# Altium PCB AQM with esp32.PcbDoc
Units mil, origin at the board's own origin, x right, y up, seen from the top; angles counter-clockwise.
Board outline 3850 x 2015 mil, 2 copper layers (Top Layer, Bottom Layer); 72 components, 75 nets, 269 pads, 0 vias.
Unrouted connection lines stored in the file: 182.
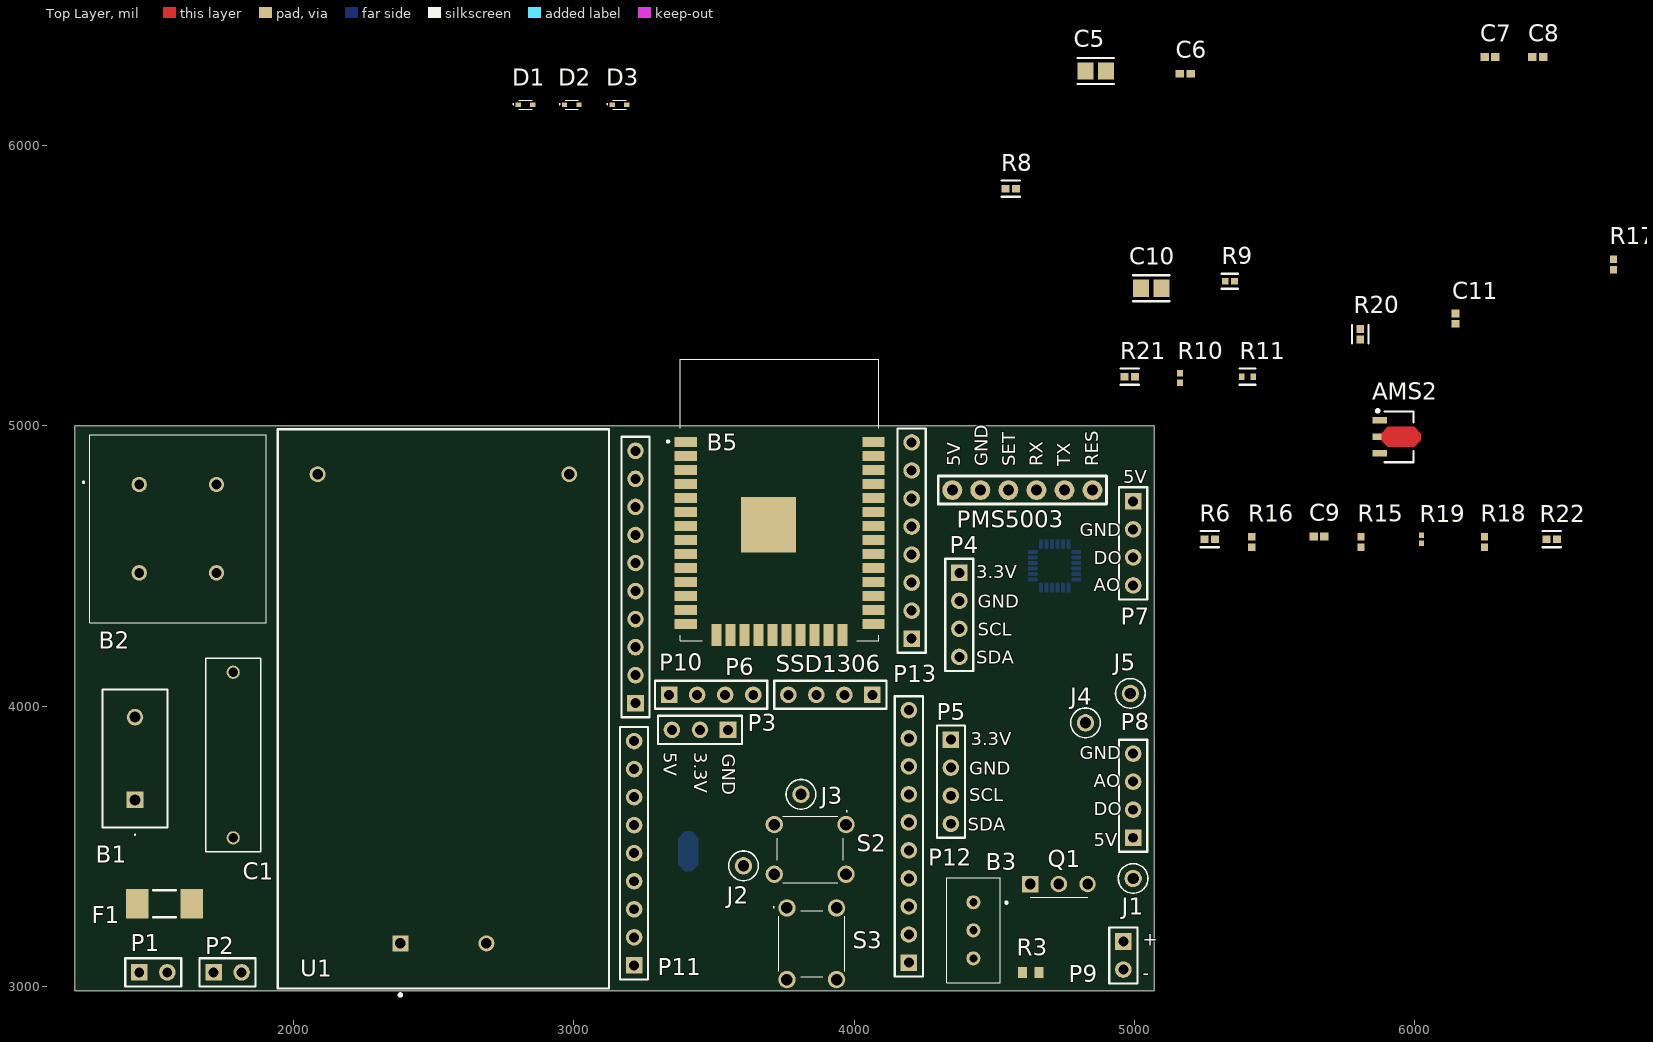
[diagram p0: Top Layer view]
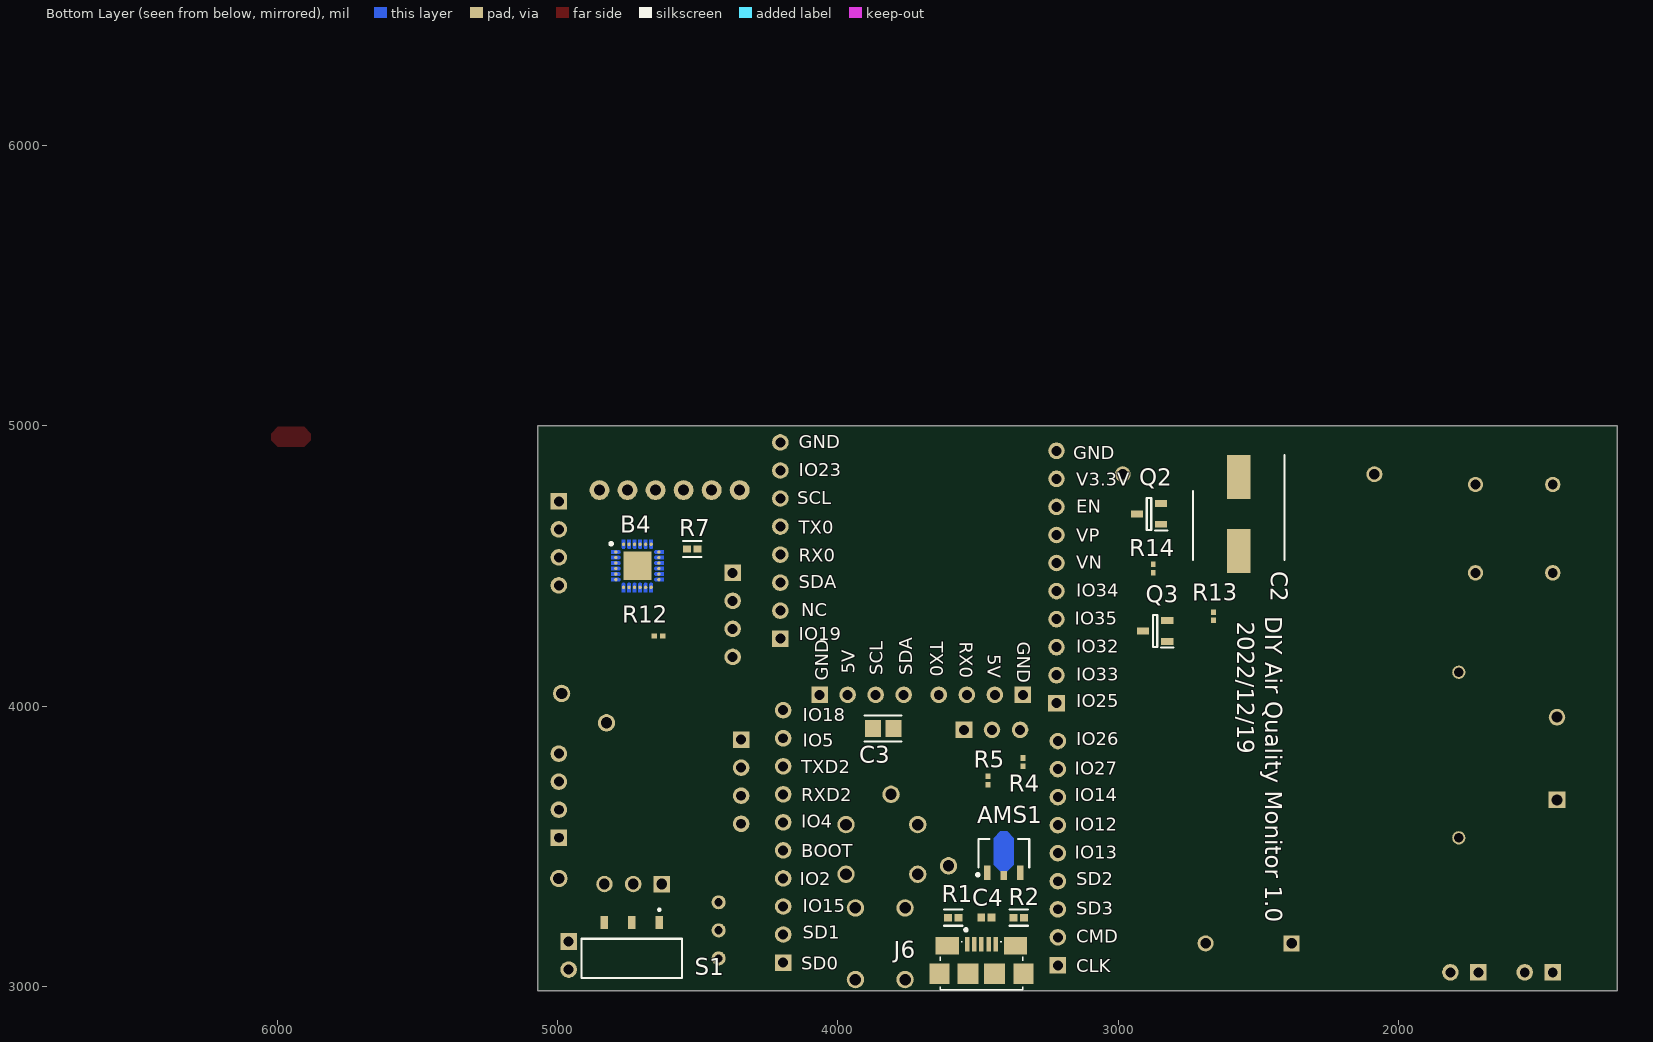
[diagram p1: Bottom Layer view, seen from below]

## Layer stack, top to bottom
Top Solder: solder mask 0.4, Solder Resist, Dk 3.5
Top Layer: signal copper 1.4
Dielectric 1: dielectric 12.6, FR-4, Dk 4.8
Bottom Layer: signal copper 1.4
Bottom Solder: solder mask 0.4, Solder Resist, Dk 3.5

## Board outline
1220,2985 5070,2985 5070,5000 1220,5000

## Design rules (kind name [scope] priority, off if disabled: settings)
Clearance [All] p1: gap=5.98 ignorepadtopadclearanceinfootprint=FALSE
MinimumSolderMaskSliver [All] p1: minsoldermaskwidth=0.98
PolygonConnect [All] p1: connectstyle=Relief reliefconductorwidth=10 reliefentries=4 polygonreliefangle="90 Angle" airgapwidth=10
RoutingVias [All] p1: holewidth=28 width=50 viastyle="Through Hole" minholewidth=28 minwidth=50 maxholewidth=28 maxwidth=50
SilkToSilkClearance [All] p1: silktosilkclearance=1
SilkToSolderMaskClearance [IsPad] p1: minsilkscreentomaskgap=5 clearancetoexposedcopper=TRUE
SolderMaskExpansion [All] p1: expansion=4.02
Width [All] p1: maxlimit=12.01 minlimit=5.98 preferedwidth=10
27 further rules are at their usual default settings.

## Classes and differential pairs
component class "ESP32 module desing": AMS2 B4 B5 C5 C6 C7 C8 C9 C10 C11 D1 D2 D3 J6 P10 P11 P12 P13 Q2 Q3 R6 R7 R8 R9 R10 R11 R12 R13 R14 R15 R16 R17 R18 R19 R20 R21 R22 S2 S3
component class "air quality monitor add esp32 chip": AMS1 B1 B2 B3 C1 C2 C3 C4 F1 J1 J2 J3 J4 J5 P1 P2 P3 P4 P5 P7 P8 P9 PMS5003 Q1 R1 R2 R3 R4 R5 S1 SSD1306 U1

## Components (designator, comment, footprint, x,y, rotation, side; value= is the part's Value field where it differs from the comment)
AMS1 "IC1" SOT89-150P350X150-3N 3408.07,3466.02 r90 bottom
AMS2 "IC1" SOT89-150P350X150-3N 5935,4960 r0 top
B1 "10D561K" 10D561K 1435,3665 r90 top
B2 "UU9.8Y-10MH" UU98Y10MH 1450,4789.96 r180 top
B3 "3296X-1-103" 3296X1223LF 4425,3200 r180 top
B4 "CP2102N-A02-GQFN24R" QFN50P400X400X80-25N-D 4715,4500 r180 bottom
B5 "ESP32-WROOM-32D" ESP32WROOM32D 3720,4725 r0 top
C1 "0.1uF" MPX-104K275VAC-C-D2 1785,3825 r90 top
C2 "220uF" CAPAE830X1050N 2570,4685 r270 bottom
C3 "22uF" FP-GRM219-0_2-0_15-IPC_A 3838.55,3920 r0 bottom
C4 "10uF" CAPC1005X70N 3470,3245 r0 bottom
C5 "4.7uF" FP-CL21-IPC_A 4861.45,6265 r0 top
C6 "100nF" CAPC1050X55X23ML05T13 5180.71,6255 r0 top
C7 "100nF" CAPC1050X55X23ML05T13 6267.83,6315 r0 top
C8 "100nF" CAPC1050X55X23ML05T13 6437.83,6315 r0 top
C9 "100nF" CAPC1050X55X23ML05T13 5657.83,4605 r0 top
C10 "22uF" FP-GRM219-0_2-0_15-IPC_A 5060,5490 r0 top
C11 "10uF" CAPC1005X70N 6145,5381.89 r90 top
D1 "LESD5D5.0CT1G" LESD5D50CT1G 2827.83,6145 r0 top
D2 "LESD5D5.0CT1G" LESD5D50CT1G 2992.83,6145 r0 top
D3 "LESD5D5.0CT1G" LESD5D50CT1G 3162.83,6145 r0 top
F1 "S6125-M2-0.5A" CAPC6125X25N 1540,3295 r0 top
J1 "5004" FP-5004-MFG 4995,3385 r0 top
J2 "5004" FP-5004-MFG 3605,3430 r0 top
J3 "5004" FP-5004-MFG 3810,3685 r0 top
J4 "5004" FP-5004-MFG 4825,3940 r0 top
J5 "5004" FP-5004-MFG 4985,4045 r0 top
J6 "10118192-0001LF" AMPHENOL_10118192-0001LF 3487.76,3150.32 r180 bottom
P1 "AC Current suppy pin Header 2" HDR1X2 1450,3050 r0 top
P2 "uv lamp connect pin Header 2" HDR1X2 1715,3050 r0 top
P3 "Header 3" HDR1X3 3550,3915 r180 top
P4 "Si7021 Sensor Header" HDR1X4 4375,4475 r270 top
P5 "SGP30 Sensor Header" HDR1X4 4345,3880 r270 top
P6 "ZE08-CH2O sensor Header" HDR1X4 3340,4040 r0 top
P7 "MQ7 sensor Header" HDR1X4 4995,4730 r270 top
P8 "MQ131 sensor Header" HDR1X4 4995,3530 r90 top
P9 "5V FAN Header 2" HDR1X2 4960,3160 r270 top
P10 "Header 10" HDR1X10 3220,4010 r90 top
P11 "Header 9" HDR1X9 3215,3075 r90 top
P12 "Header 10" HDR1X10 4195,3085 r90 top
P13 "Header 8" HDR1X8 4205,4240 r90 top
PMS5003 "PMS5003" "PMS5003 PM2.5 Sensor" 4600,4770 r90 top
Q1 "2SC1384-TA" 2SC1384-TA 4627.64,3365 r0 top
Q2 "SS8050-G" SOT95P240X115-3N 2890,4685 r0 bottom
Q3 "SS8050-G" SOT95P240X115-3N 2868.31,4267.4 r0 bottom
R1 "0R" FP-RC0402-0_4-IPC_A 3588.84,3245 r0 bottom
R2 "0R" FP-RC0402-0_4-IPC_A 3355,3245 r180 bottom
R3 "3.3kΩ" RESC1608X55X25ML10T15 4630,3050 r180 top
R4 "10kΩ" RESC1005X40X25LL05T10 3340,3799.76 r270 bottom value=10kO
R5 "10kΩ" RESC1005X40X25LL05T10 3465,3734.76 r270 bottom value=10kO
R6 "0R" FP-RC0402-0_4-IPC_A 5267.83,4595 r0 top
R7 "0R" FP-RC0402-0_4-IPC_A 4518.84,4560 r180 bottom
R8 "0R" FP-RC0402-0_4-IPC_A 4558.84,5845 r0 top
R9 "22.1kΩ" FP-RC0402-0_4-IPC_B 5340,5515 r0 top value=22.1kO
R10 "47.5kΩ" RESC1005X40X25NL05T10 5162.83,5170 r90 top value=47.5kO
R11 "2kΩ" FP-RC_L0402-MFG 5402.83,5175 r0 top value=2kO
R12 "10kΩ" RESC1005X40X25LL05T10 4640,4250 r180 bottom value=10kO
R13 "10kΩ" RESC1005X40X25LL05T10 2660,4320 r90 bottom value=10kO
R14 "10kΩ" RESC1005X40X25LL05T10 2875,4490.24 r270 bottom value=10kO
R15 "100Ω" RESC1005X40X25ML05T10 5807.83,4585 r90 top value=100O
R16 "100Ω" RESC1005X40X25ML05T10 5417.83,4585 r90 top value=100O
R17 "100Ω" RESC1005X40X25ML05T10 6707.83,5575 r90 top value=100O
R18 "100Ω" RESC1005X40X25ML05T10 6247.83,4585 r90 top value=100O
R19 "10kΩ" RESC1005X40X25LL05T10 6022.83,4595 r90 top value=10kO
R20 "0R" FP-RC0402-0_4-IPC_A 5805,5326.16 r90 top
R21 "0R" FP-RC0402-0_4-IPC_A 4982.83,5175 r0 top
R22 "0R" FP-RC0402-0_4-IPC_A 6487.83,4595 r0 top
S1 "SK-3245S-L1-A" SK3245SL1A 4735,3100 r0 bottom
S2 "TL1105AF160Q" TL1105AF160Q 3970.91,3577.17 r270 top
S3 "TL1105AF160Q" TL1105AF160Q 3760,3280 r0 top
SSD1306 "Display" HDR1X4 4065,4040 r180 top
U1 "HLK-10M05" FP-HLK-10M05-MFG 2535,3990 r90 top

## Footprints (in the part's own frame and the unit in brackets; to place one, negate y for a bottom-side part, rotate by r counter-clockwise, add the part's x,y. Pads: shape width x height; smd on the part's side, far side on the other; paste and mask are expansions set on the pad)
2SC1384-TA [mm]
  rect 1.493x1.493 hole 0.96: 1(0,0)
  round 1.493 hole 0.96: 2(2.6,0) 3(5.2,0)
  silkscreen extent 0,-1.2 5.2,-1.2
10D561K [mm]
  rect 1.5x1.5 hole 1: 1(0,0)
  round 1.5 hole 1: 2(7.5,0)
  silkscreen extent -3.2,-2.95 10,2.95, body extent -2.5,-2.95 10,2.95, height 15.6
3296X1223LF [mm]
  round 1.269 hole 0.74: 1(0,-2.54) 2(0,0) 3(0,2.54)
  silkscreen extent -3.1,-4.76 2.41,4.76, body extent -2.03,-4.83 2.8,6.22, height 10.03
AMPHENOL_10118192-0001LF [mm]
  rect 0.4x1.35 smd: 1(-1.3,0) 2(-0.65,0) 3(0,0) 4(0.65,0) 5(1.3,0)
  rect 2.1x1.6 smd: SH1(-3.1,-0.125) SH2(3.1,-0.125)
  rect 1.8x1.9 smd: SH3(-3.8,-2.675) SH6(3.8,-2.675)
  rect 1.9x1.9 smd: SH4(-1.2,-2.675) SH5(1.2,-2.675)
  silkscreen extent -3.75,-4.13 3.75,1.4, body extent -3.94,-4.99 3.98,0.67, height 3.09
CAPAE830X1050N [mm]
  rect 4x2.15 smd: 1(-3.35,0) 2(3.35,0)
  silkscreen extent -5.35,-4.15 4.15,4.15, body extent -4.65,-4.32 4.65,4.18, height 10.5
CAPC1005X70N [mm]
  rect 0.69x0.72 smd: 1(-0.46,0) 2(0.46,0)
  body extent -0.5,-0.25 0.5,0.25, height 0.7
CAPC1050X55X23ML05T13 [mm] "Chip Capacitor, 2-Leads, Body 1.05x0.55mm, IPC Low Density"
  rect 0.76x0.72 smd: 1(-0.49,0) 2(0.49,0)
  body extent -0.53,-0.28 0.53,0.27, height 0.55
CAPC6125X25N [mm] "Chip Capacitor, 2-Leads, Body 6.10x2.50mm, IPC Medium Density"
  rect 2.05x2.65 smd: 1(-2.475,0) 2(2.475,0)
  silkscreen extent -1.05,-1.22 1.05,1.23, body extent -3.15,-1.3 3.15,1.3, height 2.5
ESP32WROOM32D [mm]
  rect 2x0.9 smd: 1(-8.15,5.51) 2(-8.15,4.24) 3(-8.15,2.97) 4(-8.15,1.7) 5(-8.15,0.43) 6(-8.15,-0.84) 7(-8.15,-2.11) 8(-8.15,-3.38) 9(-8.15,-4.65) 10(-8.15,-5.92) 11(-8.15,-7.19) 12(-8.15,-8.46) 13(-8.15,-9.73) 14(-8.15,-11) 25(8.85,-11) 26(8.85,-9.73) 27(8.85,-8.46) 28(8.85,-7.19) 29(8.85,-5.92) 30(8.85,-4.65) 31(8.85,-3.38) 32(8.85,-2.11) 33(8.85,-0.84) 34(8.85,0.43) 35(8.85,1.7) 36(8.85,2.97) 37(8.85,4.24) 38(8.85,5.51)
  rect 0.9x2 smd: 15(-5.365,-12) 16(-4.095,-12) 17(-2.825,-12) 18(-1.555,-12) 19(-0.285,-12) 20(0.985,-12) 21(2.255,-12) 22(3.525,-12) 23(4.795,-12) 24(6.065,-12)
  rrect0% 5x5 smd: 39(-0.65,-1.99)
  silkscreen extent -9.85,-12.5 9.35,13, body extent -8.62,-12.45 9.38,13.05, height 2.7
FP-5004-MFG [mm]
  round 1.57 hole 1.02 paste-1000 mask+0: 1(0,0)
  silkscreen extent -1.35,-1.34 1.35,1.34, body extent -1.45,-1.45 1.45,1.45, height 0.25
FP-CL21-IPC_A [mil]
  rect 57.27x61.27 smd paste+0 mask+0: 1(-36.45,0) 2(36.45,0)
  silkscreen extent -65,-46 65,46, body extent -85,-50 85,50, height 10
FP-GRM219-0_2-0_15-IPC_A [mil]
  rect 57.27x61.27 smd paste+0 mask+0: 1(-36.45,0) 2(36.45,0)
  silkscreen extent -65,-46 65,46, body extent -39,-25 39,25, height 39
FP-HLK-10M05-MFG [mm]
  rect 1.45x1.45 hole 0.95 paste-1000 mask+0: 1(-21.25,3.9)
  round 1.45 hole 0.95 paste-1000 mask+0: 2(-21.25,-3.9) 3(21.25,11.4) 4(21.25,-11.4)
  silkscreen extent -26.05,-15.01 25.33,15.01, body extent -25.43,-15.11 25.43,15.11, height 0.25
FP-RC0402-0_4-IPC_A [mil]
  rect 28.16x26.48 smd paste+0 mask+0: 1(-18.84,0) 2(18.84,0)
  silkscreen extent -33,-29 33,29, body extent -20,-10 20,10, height 16
FP-RC0402-0_4-IPC_B [mil]
  rect 24.23x22.54 smd paste+0 mask+0: 1(-16.87,0) 2(16.87,0)
  silkscreen extent -29,-27 29,27, body extent -35,-17 35,17, height 10
FP-RC_L0402-MFG [mm]
  rect 0.5x0.6 smd paste+0 mask+0: 1(-0.5,0) 2(0.5,0)
  silkscreen extent -0.74,-0.74 0.74,0.74, body extent -0.85,-0.4 0.85,0.4, height 0.25
HDR1X2 [mm] "Connector; Header; 2 Position"
  rect 1.5x1.5 hole 0.9: 1(0,0)
  round 1.5 hole 0.9: 2(2.54,0)
  silkscreen extent -1.27,-1.27 3.81,1.27
HDR1X3 [mm] "Connector; Header; 3 Position"
  rect 1.5x1.5 hole 0.9: 1(0,0)
  round 1.5 hole 0.9: 2(2.54,0) 3(5.08,0)
  silkscreen extent -1.27,-1.27 6.35,1.27
HDR1X4 [mm] "Connector; Header; 4 Position"
  rect 1.5x1.5 hole 0.9: 1(0,0)
  round 1.5 hole 0.9: 2(2.54,0) 3(5.08,0) 4(7.62,0)
  silkscreen extent -1.27,-1.27 8.89,1.27
HDR1X8 [mm] "Connector; Header; 8 Position"
  rect 1.5x1.5 hole 0.9: 1(0,0)
  round 1.5 hole 0.9: 2(2.54,0) 3(5.08,0) 4(7.62,0) 5(10.16,0) 6(12.7,0) 7(15.24,0) 8(17.78,0)
  silkscreen extent -1.27,-1.27 19.05,1.27
HDR1X9 [mm] "Connector; Header; 9 Position"
  rect 1.5x1.5 hole 0.9: 1(0,0)
  round 1.5 hole 0.9: 2(2.54,0) 3(5.08,0) 4(7.62,0) 5(10.16,0) 6(12.7,0) 7(15.24,0) 8(17.78,0) 9(20.32,0)
  silkscreen extent -1.27,-1.27 21.59,1.27
HDR1X10 [mm] "Connector; Header; 10 Position"
  rect 1.5x1.5 hole 0.9: 1(0,0)
  round 1.5 hole 0.9: 2(2.54,0) 3(5.08,0) 4(7.62,0) 5(10.16,0) 6(12.7,0) 7(15.24,0) 8(17.78,0) 9(20.32,0) 10(22.86,0)
  silkscreen extent -1.27,-1.27 24.13,1.27
LESD5D50CT1G [mm]
  rect 0.48x0.4 smd: 1(-0.66,0) 2(0.66,0)
  silkscreen extent -1.15,-0.4 0.6,0.4, body extent -0.8,-0.4 0.8,0.4, height 0.6
MPX-104K275VAC-C-D2 [mm]
  round 1.2 hole 0.85: 1(-7.5,0) 2(7.5,0)
  silkscreen extent -8.75,-2.5 8.75,2.5, body extent -8.75,-2.5 8.75,2.5, height 12
"PMS5003 PM2.5 Sensor" [mm] "PMS5003 PM2.5 Sensor"
  round 1.8 hole 1: GND(0,3.81) RESET(0,-6.35) RX(0,-1.27) SET(0,1.27) TX(0,-3.81) VCC(0,6.35)
  silkscreen extent -1.27,-7.62 1.27,7.62, body extent -1.27,-7.62 1.27,7.62, height 8.5
QFN50P400X400X80-25N-D [mm]
  round 0.3 smd: 1(-1.95,1.25) 2(-1.95,0.75) 3(-1.95,0.25) 4(-1.95,-0.25) 5(-1.95,-0.75) 6(-1.95,-1.25) 7(-1.25,-1.95) 8(-0.75,-1.95) 9(-0.25,-1.95) 10(0.25,-1.95) 11(0.75,-1.95) 12(1.25,-1.95) 13(1.95,-1.25) 14(1.95,-0.75) 15(1.95,-0.25) 16(1.95,0.25) 17(1.95,0.75) 18(1.95,1.25) 19(1.25,1.95) 20(0.75,1.95) 21(0.25,1.95) 22(-0.25,1.95) 23(-0.75,1.95) 24(-1.25,1.95)
  rrect0% 2.55x2.55 smd: 25(0,0)
  Top Layer region: -1.1,2.375 -1.099,1.675 -1.104,1.636 -1.119,1.599 -1.143,1.568 -1.174,1.544 -1.211,1.529 -1.25,1.524 -1.289,1.529 -1.326,1.544 -1.357,1.568 -1.381,1.599 -1.396,1.636 -1.401,1.675 -1.4,1.675 -1.4,2.375 -1.1,2.375
  Top Layer region: -0.6,2.375 -0.599,1.675 -0.604,1.636 -0.619,1.599 -0.643,1.568 -0.674,1.544 -0.711,1.529 -0.75,1.524 -0.789,1.529 -0.826,1.544 -0.857,1.568 -0.881,1.599 -0.896,1.636 -0.901,1.675 -0.9,1.675 -0.9,2.375 -0.6,2.375
  Top Layer region: -0.1,2.375 -0.099,1.675 -0.104,1.636 -0.119,1.599 -0.143,1.568 -0.174,1.544 -0.211,1.529 -0.25,1.524 -0.289,1.529 -0.326,1.544 -0.357,1.568 -0.381,1.599 -0.396,1.636 -0.401,1.675 -0.4,1.675 -0.4,2.375 -0.1,2.375
  Top Layer region: 0.4,2.375 0.401,1.675 0.396,1.636 0.381,1.599 0.357,1.568 0.326,1.544 0.289,1.529 0.25,1.524 0.211,1.529 0.174,1.544 0.143,1.568 0.119,1.599 0.104,1.636 0.099,1.675 0.1,1.675 0.1,2.375 0.4,2.375
  Top Layer region: 0.9,2.375 0.901,1.675 0.896,1.636 0.881,1.599 0.857,1.568 0.826,1.544 0.789,1.529 0.75,1.524 0.711,1.529 0.674,1.544 0.643,1.568 0.619,1.599 0.604,1.636 0.599,1.675 0.6,1.675 0.6,2.375 0.9,2.375
  Top Layer region: 1.4,2.375 1.401,1.675 1.396,1.636 1.381,1.599 1.357,1.568 1.326,1.544 1.289,1.529 1.25,1.524 1.211,1.529 1.174,1.544 1.143,1.568 1.119,1.599 1.104,1.636 1.099,1.675 1.1,1.675 1.1,2.375 1.4,2.375
  Top Layer region: 2.375,1.1 1.675,1.099 1.636,1.104 1.599,1.119 1.568,1.143 1.544,1.174 1.529,1.211 1.524,1.25 1.529,1.289 1.544,1.326 1.568,1.357 1.599,1.381 1.636,1.396 1.675,1.401 1.675,1.4 2.375,1.4 2.375,1.1
  Top Layer region: 2.375,0.6 1.675,0.599 1.636,0.604 1.599,0.619 1.568,0.643 1.544,0.674 1.529,0.711 1.524,0.75 1.529,0.789 1.544,0.826 1.568,0.857 1.599,0.881 1.636,0.896 1.675,0.901 1.675,0.9 2.375,0.9 2.375,0.6
  Top Layer region: 2.375,0.1 1.675,0.099 1.636,0.104 1.599,0.119 1.568,0.143 1.544,0.174 1.529,0.211 1.524,0.25 1.529,0.289 1.544,0.326 1.568,0.357 1.599,0.381 1.636,0.396 1.675,0.401 1.675,0.4 2.375,0.4 2.375,0.1
  Top Layer region: 2.375,-0.4 1.675,-0.401 1.636,-0.396 1.599,-0.381 1.568,-0.357 1.544,-0.326 1.529,-0.289 1.524,-0.25 1.529,-0.211 1.544,-0.174 1.568,-0.143 1.599,-0.119 1.636,-0.104 1.675,-0.099 1.675,-0.1 2.375,-0.1 2.375,-0.4
  Top Layer region: 2.375,-0.9 1.675,-0.901 1.636,-0.896 1.599,-0.881 1.568,-0.857 1.544,-0.826 1.529,-0.789 1.524,-0.75 1.529,-0.711 1.544,-0.674 1.568,-0.643 1.599,-0.619 1.636,-0.604 1.675,-0.599 1.675,-0.6 2.375,-0.6 2.375,-0.9
  Top Layer region: 2.375,-1.4 1.675,-1.401 1.636,-1.396 1.599,-1.381 1.568,-1.357 1.544,-1.326 1.529,-1.289 1.524,-1.25 1.529,-1.211 1.544,-1.174 1.568,-1.143 1.599,-1.119 1.636,-1.104 1.675,-1.099 1.675,-1.1 2.375,-1.1 2.375,-1.4
  Top Layer region: 1.1,-2.375 1.099,-1.675 1.104,-1.636 1.119,-1.599 1.143,-1.568 1.174,-1.544 1.211,-1.529 1.25,-1.524 1.289,-1.529 1.326,-1.544 1.357,-1.568 1.381,-1.599 1.396,-1.636 1.401,-1.675 1.4,-1.675 1.4,-2.375 1.1,-2.375
  Top Layer region: 0.6,-2.375 0.599,-1.675 0.604,-1.636 0.619,-1.599 0.643,-1.568 0.674,-1.544 0.711,-1.529 0.75,-1.524 0.789,-1.529 0.826,-1.544 0.857,-1.568 0.881,-1.599 0.896,-1.636 0.901,-1.675 0.9,-1.675 0.9,-2.375 0.6,-2.375
  Top Layer region: 0.1,-2.375 0.099,-1.675 0.104,-1.636 0.119,-1.599 0.143,-1.568 0.174,-1.544 0.211,-1.529 0.25,-1.524 0.289,-1.529 0.326,-1.544 0.357,-1.568 0.381,-1.599 0.396,-1.636 0.401,-1.675 0.4,-1.675 0.4,-2.375 0.1,-2.375
  Top Layer region: -0.4,-2.375 -0.401,-1.675 -0.396,-1.636 -0.381,-1.599 -0.357,-1.568 -0.326,-1.544 -0.289,-1.529 -0.25,-1.524 -0.211,-1.529 -0.174,-1.544 -0.143,-1.568 -0.119,-1.599 -0.104,-1.636 -0.099,-1.675 -0.1,-1.675 -0.1,-2.375 -0.4,-2.375
  Top Layer region: -0.9,-2.375 -0.901,-1.675 -0.896,-1.636 -0.881,-1.599 -0.857,-1.568 -0.826,-1.544 -0.789,-1.529 -0.75,-1.524 -0.711,-1.529 -0.674,-1.544 -0.643,-1.568 -0.619,-1.599 -0.604,-1.636 -0.599,-1.675 -0.6,-1.675 -0.6,-2.375 -0.9,-2.375
  Top Layer region: -1.4,-2.375 -1.401,-1.675 -1.396,-1.636 -1.381,-1.599 -1.357,-1.568 -1.326,-1.544 -1.289,-1.529 -1.25,-1.524 -1.211,-1.529 -1.174,-1.544 -1.143,-1.568 -1.119,-1.599 -1.104,-1.636 -1.099,-1.675 -1.1,-1.675 -1.1,-2.375 -1.4,-2.375
  Top Layer region: -2.375,-1.1 -1.675,-1.099 -1.636,-1.104 -1.599,-1.119 -1.568,-1.143 -1.544,-1.174 -1.529,-1.211 -1.524,-1.25 -1.529,-1.289 -1.544,-1.326 -1.568,-1.357 -1.599,-1.381 -1.636,-1.396 -1.675,-1.401 -1.675,-1.4 -2.375,-1.4 -2.375,-1.1
  Top Layer region: -2.375,-0.6 -1.675,-0.599 -1.636,-0.604 -1.599,-0.619 -1.568,-0.643 -1.544,-0.674 -1.529,-0.711 -1.524,-0.75 -1.529,-0.789 -1.544,-0.826 -1.568,-0.857 -1.599,-0.881 -1.636,-0.896 -1.675,-0.901 -1.675,-0.9 -2.375,-0.9 -2.375,-0.6
  Top Layer region: -2.375,-0.1 -1.675,-0.099 -1.636,-0.104 -1.599,-0.119 -1.568,-0.143 -1.544,-0.174 -1.529,-0.211 -1.524,-0.25 -1.529,-0.289 -1.544,-0.326 -1.568,-0.357 -1.599,-0.381 -1.636,-0.396 -1.675,-0.401 -1.675,-0.4 -2.375,-0.4 -2.375,-0.1
  Top Layer region: -2.375,0.4 -1.675,0.401 -1.636,0.396 -1.599,0.381 -1.568,0.357 -1.544,0.326 -1.529,0.289 -1.524,0.25 -1.529,0.211 -1.544,0.174 -1.568,0.143 -1.599,0.119 -1.636,0.104 -1.675,0.099 -1.675,0.1 -2.375,0.1 -2.375,0.4
  Top Layer region: -2.375,0.9 -1.675,0.901 -1.636,0.896 -1.599,0.881 -1.568,0.857 -1.544,0.826 -1.529,0.789 -1.524,0.75 -1.529,0.711 -1.544,0.674 -1.568,0.643 -1.599,0.619 -1.636,0.604 -1.675,0.599 -1.675,0.6 -2.375,0.6 -2.375,0.9
  Top Layer region: -2.375,1.4 -1.675,1.401 -1.636,1.396 -1.599,1.381 -1.568,1.357 -1.544,1.326 -1.529,1.289 -1.524,1.25 -1.529,1.211 -1.544,1.174 -1.568,1.143 -1.599,1.119 -1.636,1.104 -1.675,1.099 -1.675,1.1 -2.375,1.1 -2.375,1.4
  silkscreen extent -2.5,1.88 -2.25,2.12, body extent -2.07,-2.07 2.03,2.03, height 0.8
RESC1005X40X25LL05T10 [mm] "Chip Resistor, 2-Leads, Body 1.00x0.50mm, IPC High Density"
  rect 0.5x0.45 smd: 1(-0.375,0) 2(0.375,0)
  body extent -0.53,-0.27 0.53,0.28, height 0.4
RESC1005X40X25ML05T10 [mm] "Chip Resistor, 2-Leads, Body 1.00x0.50mm, IPC Low Density"
  rect 0.7x0.65 smd: 1(-0.475,0) 2(0.475,0)
  body extent -0.53,-0.27 0.53,0.28, height 0.4
RESC1005X40X25NL05T10 [mm] "Chip Resistor, 2-Leads, Body 1.00x0.50mm, IPC Medium Density"
  rect 0.6x0.55 smd: 1(-0.425,0) 2(0.425,0)
  body extent -0.53,-0.27 0.53,0.28, height 0.4
RESC1608X55X25ML10T15 [mm] "Chip Resistor, 2-Leads, Body 1.60x0.80mm, IPC Low Density"
  rect 0.8x1 smd: 1(-0.75,0) 2(0.75,0)
  body extent -0.85,-0.45 0.85,0.45, height 0.55
SK3245SL1A [mm]
  rect 0.7x1.2 smd: 1(-2.5,-3.25) 2(0,-3.25) 3(2.5,-3.25)
  silkscreen extent -4.55,-4.5 4.55,1.78, body extent -4.55,-3.62 4.55,3.88, height 3.2
SOT89-150P350X150-3N [mm] "SOT89, 3-Leads, Body 4.50x2.50mm, Pitch 1.50mm, Lead Span 3.5mm, IPC Medium Density"
  rect 1.3x0.6 smd: 1(-1.55,1.5) 3(-1.55,-1.5)
  rect 0.8x0.6 smd: 2(-1.8,0)
  Top Layer region: -1.4,0.3 -0.8,0.9 1.6,0.9 2.2,0.3 2.2,-0.3 1.6,-0.9 -0.8,-0.9 -1.4,-0.3
  silkscreen extent -1.85,-2.3 1.53,2.48, body extent -2.02,-2.27 2.23,2.27, height 1.5
SOT95P240X115-3N [mm]
  rect 1.1x0.6 smd: 1(-1.1,0.95) 2(-1.1,-0.95) 3(1.1,0)
  silkscreen extent -1.65,-1.45 0.2,1.5, body extent -1.33,-1.45 1.07,1.45, height 1.15
TL1105AF160Q [mm]
  round 1.575 hole 1.05: 1(0,0) 2(0,-6.5) 3(4.5,0) 4(4.5,-6.5)
  silkscreen extent -1.25,-6.25 5.25,0.1, body extent -0.92,-6.85 5.08,0.5, height 6.9
UU98Y10MH [mm]
  round 1.4 hole 0.9: 1(0,0) 2(-7,0) 3(-7,8) 4(0,8)
  silkscreen extent -11.5,-4.5 5.1,12.5, body extent -11.5,-4.5 4.5,12.5, height 14.1

## Part data
AMS1 AMS2: library part IC?, "75dB@(120Hz) 1A 1.25V@(1A) ±125?@(Tj) Fixed 3.3V~3.3V Positive 1 20V SOT-89 Linear Voltage Regulators (LDO) ROHS", LCSC Part #=C2904742, Manufacturer=YONGYUTAI, Mfr. Part #=AMS1117-3.3, Package=SOT-89, Datasheet=https://datasheet.lcsc.com/lcsc/2110121330_YONGYUTAI-AMS1117-3-3_C2904742.pdf
B1: "920V 42.3J 180pF@1kHz 460V 350V 504V~616V 2.5kA Plugin Varistors ROHS", LCSC Part #=C113236, Manufacturer="Hongzhi Elec", Package=Plugin, Datasheet=https://datasheet.lcsc.com/lcsc/1811141751_Hongzhi-Elec-10D561K_C113236.pdf, Mfr. Part #=10D561K
B2: "10mH@1kHz 1.2O 2 500mA 50V Plugin Common Mode Filters ROHS", LCSC Part#=C75192, Manufacturer="FH (Guangdong Fenghua Advanced Tech)", Package=Plugin, Datasheet=https://datasheet.lcsc.com/lcsc/1810311213_FH--Guangdong-Fenghua-Advanced-Tech-UU9-8Y-10mH_C75192.pdf, Mfr.Part #=UU9.8Y-10MH
B3: "±10% 10kO Plugin Variable Resistors/Potentiometers ROHS", LCSC Part #=C118955, Manufacturer="BOCHEN(Chengdu Guosheng Tech)", Package=Plugin, Datasheet=https://datasheet.lcsc.com/lcsc/1811011704_BOCHEN-Chengdu-Guosheng-Tech-3296X-1-103_C118955.pdf, Mfr. Part #=3296X-1-103
B4: "USB Interface IC USB to UART bridge - QFN24", LCSC Part#=C969151, Manufacturer="SILICON LABS", Package=QFN-24-EP(4x4), Datasheet=https://datasheet.lcsc.com/lcsc/2201131400_SILICON-LABS-CP2102N-A02-GQFN24R_C969151.pdf, Mfr.Part #=CP2102N-A02-GQFN24R
B5: "WiFi Modules (802.11) SMD Module, ESP32-D0WD, 32Mbits SPI flash, UART mode, PCB antenna", Manufacturer_Name="Espressif Systems", Mouser Part Number=N/A, Datasheet Link=https://www.mouser.com/datasheet/2/891/esp32-wroom-32d_esp32-wroom-32u_datasheet_en-1365844.pdf, Geometry.Height=3.1mm, Manufacturer_Part_Number=ESP32-WROOM-32D, Mouser Price/Stock=https://www.mouser.co.uk/ProductDetail/Espressif-Systems/ESP32-WROOM-32D?qs=MLItCLRbWszx2KabkKPu5A%3D%3D
C1: library part MPX-104K275VAC-C-D2, "0.1uF ±10% -40?~+110? X2 275VAC Radial Leaded,P=15mm Suppression Capacitors ROHS", LCSC Part #=C3249976, Manufacturer=CORETONG, Package="Radial Leaded,P=15mm", Datasheet=https://datasheet.lcsc.com/lcsc/2207051802_CORETONG-MPX-104K275VAC-C-D2_C3249976.pdf, Mfr. Part #=MPX-104K275VAC-C-D2
C2: library part UUR1C221MNL1GS, "-40?~+85? 2000hrs@85? 220uF 10mm 16V 8mm 215mA@120Hz ±20% SMD,D8xL10mm Aluminum Electrolytic Capacitors - SMD ROHS", LCSC Part#=C445237, Manufacturer=Nichicon, Package=SMD,D8xL10mm, Datasheet=https://datasheet.lcsc.com/lcsc/2002121532_Nichicon-UUR1C221MNL1GS_C445237.pdf, Mfr.Part #=UUR1C221MNL1GS
C3 C10: library part CMP-06035-056251-1, "Chip Multilayer Ceramic Capacitors for General Purpose, 0805, 22uF, X5R, 15%, 20%, 16V", LCSC Part #=C162295, Manufacturer="Murata Electronics", Mfr. Part #=GRM219R61C226ME15L, Package=0805, Datasheet=https://datasheet.lcsc.com/lcsc/1811141821_Murata-Electronics-GRM219R61C226ME15L_C162295.pdf
C4 C11: library part CL05A106MQ5NUNC, "6.3V 10uF X5R ±20% 0402 Multilayer Ceramic Capacitors MLCC - SMD/SMT ROHS", LCSC Part #=C15525, Manufacturer="Samsung Electro-Mechanics", Package=0402, Datasheet Link=https://datasheet.datasheetarchive.com/originals/distributors/Datasheets-DGA10/2406160.pdf, Mfr. Part #=CL05A106MQ5NUNC
C5: library part CMP-13271-002624-1, "X5R 25V 4.7uF ±10% 0805 Multilayer Ceramic Capacitors MLCC - SMD/SMT ROHS", LCSC Part#=C1779, Manufacturer="Samsung Electro-Mechanics", Mfr.Part #=CL21A475KAQNNNE, Package=0805, Datasheet=https://datasheet.lcsc.com/lcsc/1810261822_Samsung-Electro-Mechanics-CL21A475KAQNNNE_C1779.pdf
C6 C7 C8 C9: library part CMP-2000-05439-1, "X7R 100nF 16V ±10% 0402 Multilayer Ceramic Capacitors MLCC - SMD/SMT ROHS", LCSC Part#=C1525, Manufacturer="Samsung Electro-Mechanics", Mfr.Part #=CL05B104KO5NNNC, Package=0402, Datasheet=https://datasheet.lcsc.com/lcsc/1810191219_Samsung-Electro-Mechanics-CL05B104KO5NNNC_C1525.pdf
D1 D2 D3: "Transient Voltage Suppressors for ESD Protection", LCSC Part#=C5199850, Manufacturer="UMW(Youtai Semiconductor Co., Ltd.)", Package=SOD-523, Datasheet=https://datasheet.lcsc.com/lcsc/2210171730_UMW-Youtai-Semiconductor-Co---Ltd--LESD5D5-0CT1G_C5199850.pdf, Mfr.Part #=LESD5D5.0CT1G
F1: "SMD Fuses ROHS", LCSC Part #=C845172, Manufacturer="SART(Nanjing Sart Tech)", Package=SMD, Datasheet=https://datasheet.lcsc.com/lcsc/2201242130_SART-Nanjing-Sart-Tech-S6125-M2-0-5A_C845172.pdf, Mfr. Part #=S6125-M2-0.5A
J1 J2 J3 J4 J5: library part CMP-2000-05575-2, "PC TEST POINT MINIATURE YELLOW", LCSC Part #=C2906762, Manufacturer=Keystone, ComponentLink2Description=Datasheet, ComponentLink2URL=https://www.keyelco.com/product-pdf.cfm?p=1313, Datasheet=https://datasheet.lcsc.com/lcsc/2201121200_Keystone-5004_C2906762.pdf, Mfr. Part #=5004, Package=5004
J6: "Single Port 5 Contact Horizontal Right Angle Shielded Micro B USB 2.0 Connector", LCSC Part#=C132564, Manufacturer="Amphenol ICC", Package=SMD, Datasheet=https://datasheet.lcsc.com/lcsc/2111290930_Amphenol-ICC-10118192-0001LF_C132564.pdf, Mfr.Part #=10118192-0001LF
P1 P2 P9: library part "Header 2", "Header, 2-Pin", LatestRevisionDate=17-Jul-2002, LatestRevisionNote="Re-released for DXP Platform.", Publisher="Altium Limited"
P3: "Header, 3-Pin", LatestRevisionDate=17-Jul-2002, LatestRevisionNote="Re-released for DXP Platform.", Publisher="Altium Limited"
P4 P5 P7 P8 SSD1306: library part "Header 4", "Header, 4-Pin"
  P5 P7 P8 SSD1306: LatestRevisionDate=17-Jul-2002, LatestRevisionNote="Re-released for DXP Platform.", Publisher="Altium Limited"
P6: library part "Header 4", "- Sensor Modules ROHS", LCSC Part#=C141344, Manufacturer="Zhengzhou Winsen Elec Tech", Mfr.Part #=ZE08-CH2O
P10 P12: "Header, 10-Pin", LatestRevisionDate=17-Jul-2002, LatestRevisionNote="Re-released for DXP Platform.", Publisher="Altium Limited"
P11: "Header, 9-Pin", LatestRevisionDate=17-Jul-2002, LatestRevisionNote="Re-released for DXP Platform.", Publisher="Altium Limited"
P13: "Header, 8-Pin", LatestRevisionDate=17-Jul-2002, LatestRevisionNote="Re-released for DXP Platform.", Publisher="Altium Limited"
PMS5003: library part "PMS5003 PM2.5 Sensor", "PMS5003 Sensor Modules ROHS", LCSC Part#=C91431, Manufacturer="Beijing Plantower", Datasheet=https://datasheet.lcsc.com/lcsc/1810251510_Beijing-Plantower-PMS5003_C91431.pdf, Mfr.Part #=PMS5003, Package=PMS5003
Q1: "TO-92-3 Bipolar Transistors - BJT ROHS", LCSC Part #=C2910422, Manufacturer="Jiangsu Changjing Electronics Technology Co., Ltd.", Package=TO-92-3, Datasheet=https://datasheet.lcsc.com/lcsc/2204131745_Jiangsu-Changjing-Electronics-Technology-Co---Ltd--2SC1384-TA_C2910422.pdf, Mfr. Part #=2SC1384-TA
Q2 Q3: "100nA 25V 300mW 200@100mA,1V 1.5A 100MHz 500mV@800mA,80mA NPN +150?@(Tj) SOT-23 Bipolar Transistors - BJT ROHS", LCSC Part#=C164885, Manufacturer="Jiangsu Changjing Electronics Technology Co., Ltd.", Package=SOT-23, Datasheet=https://datasheet.lcsc.com/lcsc/1809211025_Jiangsu-Changjing-Electronics-Technology-Co---Ltd--SS8050-G_C164885.pdf, Mfr.Part #=SS8050-G
R1 R2 R6 R7 R8 R20 R21 R22: library part CMP-2002-07342-2, "RES SMD 0 OHM JUMPER 1/16W 0402", LCSC Part #=C106231, Manufacturer=Yageo, Mfr. Part #=RC0402FR-070RL, Package=0402, Datasheet=https://www.lcsc.com/product-detail/Chip-Resistor-Surface-Mount_YAGEO-RC0402FR-070RL_C106231.html
R3: library part CMP-1012-00567-2, "100mW Thick Film Resistors 75V ±100ppm/? ±1% -55?~+155? 3.3kO 0603 Chip Resistor - Surface Mount ROHS", LCSC Part #=C108078, Manufacturer=YAGEO, Mfr. Part #=RC0603FR-073K3L, Package=0603, Resistance=3.3kO, Datasheet=https://datasheet.lcsc.com/lcsc/1811021410_YAGEO-RC0603FR-073K3L_C108078.pdf
R4 R5: library part CMP-2002-07353-1, "62.5mW 50V ±100ppm/? ±1% -55?~+155? 10kO 0402 Chip Resistor - Surface Mount ROHS", LCSC Part #=C60490, Manufacturer="Yageo / Phycomp", Mfr. Part #=RC0402FR-0710KL, Package=0402, Datasheet=https://datasheet.lcsc.com/lcsc/1809301715_YAGEO-RC0402FR-0710KL_C60490.pdf
R9: library part CMP-2002-07515-2, "RES 22.1K OHM 1% 1/16W 0402", LCSC Part#=C163478, Manufacturer=YAGEO, Mfr.Part #=RC0402FR-0722K1L, Package=0402, Datasheet=https://datasheet.lcsc.com/lcsc/1810241338_YAGEO-RC0402FR-0722K1L_C163478.pdf
R10: library part CMP-1011-00700-2, LCSC Part#=C137974, Manufacturer=YAGEO, Mfr.Part #=RC0402FR-0747K5L, Package=0402, Datasheet=https://datasheet.lcsc.com/lcsc/1810241332_YAGEO-RC0402FR-0747K5L_C137974.pdf
R11: library part CMP-2002-07580-2, "62.5mW Thick Film Resistors 50V ±100ppm/? ±1% -55?~+155? 2kO 0402 Chip Resistor - Surface Mount ROHS", LCSC Part#=C60488, Manufacturer=YAGEO, Mfr.Part #=RESC10050X35, Package=0402, ComponentLink2Description=Datasheet, ComponentLink2URL=http://www.yageo.com/documents/recent/PYu-RC_Group_51_RoHS_L_9.pdf
R12 R13 R14 R19: library part CMP-2002-07353-1, "50V 10kO Thick Film Resistors 62.5mW ±1% -55?~+155? ±100ppm/? 0402 Chip Resistor - Surface Mount ROHS", LCSC Part#=C60490, Manufacturer=YAGEO, Mfr.Part #=RC0402FR-0710KL, Package=0402
R15 R16 R17 R18: library part CMP-2002-07344-1, "100O 62.5mW 50V ±1% -55?~+155? ±100ppm/? 0402 Chip Resistor - Surface Mount ROHS", LCSC Part#=C2935235, Manufacturer=YAGEO, Mfr.Part #=RC0402FR-07100RL, Package=0402, Datasheet=https://datasheet.lcsc.com/lcsc/2201121700_YAGEO-RC0402FR-07100RL_C2935235.pdf
S1: "Surface Mount 50mA DPDT 3.2mm 12V 9.1mm 12V 3.55mm 50mA 10000 SMDSplicing Rectangular columnar -40?~+85? Black SMD Slide Switches ROHS", LCSC Part#=C405951, Manufacturer="XKB Connectivity", Package=SMD, Datasheet=https://datasheet.lcsc.com/lcsc/2002271841_XKB-Connectivity-SK-3245S-L1-A_C405951.pdf, Mfr.Part #=SK-3245S-L1-A
S2 S3: "6mm 1.4mm Round Button 50mA Straight 6mm SPST 12V Plugin,6x6mm Tactile Switches ROHS", LCSC Part#=C273465, Manufacturer=E-Switch, Package=Plugin,6x6mm, Datasheet=https://datasheet.lcsc.com/lcsc/1809291031_E-Switch-TL1105AF160Q_C273465.pdf, Mfr.Part #=TL1105AF160Q
U1: library part CMP-218581-000001-1, "5V 2A 90VAC~265VAC 1 120V~350V Isolated Regulated 10W AC-DC 80% Plugin Power Modules ROHS", LCSC Part#=C403745, Manufacturer=HI-LINK, Package=Plugin, Mfr.Part #=HLK-10M05

## Nets (pads, with @x,y where several pads share a name; then routed paths per layer and width w, separated by ;. In a path a pad name is that pad's centre, name@x,y a point inside that pad or via, vN(x,y) a via of type N, cw(c..) or ccw(c..) an arc to the next point about the centre after c; other vN are vias at no path point)
3.3V: J3.1 P3.2 P4.1 P5.1 R2.2 R4.2 R5.1
5V: C2.1 J2.1 P3.3 P6.2 P7.1 P8.1 PMS5003.VCC R1.1 S1.2 SSD1306.2 U1.4
Boot: B5.25 P12.5 Q3.3 S3.4
CLK: B5.20 P11.1
CMD: B5.19 P11.2
D+: B4.3 D1.1 J6.3
D-: B4.4 D2.1 J6.2
DOUT1: J4.1 P7.3
DOUT2: J5.1 P8.2
DTR: B4.23 Q3.2 R13.1
Enable: B5.3 C9.1 P10.8 Q2.3 R19.1 S2.4
GND: AMS1.1 AMS2.1 B4.2 B4.25 B5.1 B5.15 B5.38 B5.39 C2.2 C3.2 C4.1 C5.1 C6.1 C9.2 C10.2 C11.1 D1.2 D2.2 D3.2 J1.1 J6.5 J6.SH1 J6.SH2 J6.SH3 J6.SH4 J6.SH5 J6.SH6 P3.1 P4.2 P5.2 P6.1 P7.2 P8.4 P10.10 P13.8 PMS5003.GND Q1.1 R10.1 R12.2 R22.2 S2.1 S3.1 SSD1306.1 U1.3
IO2: B5.24 P12.4
IO4: B5.26 P8.3 P12.6
IO5: B5.29 P12.9
IO12: P11.6 R16.2
IO13: P11.5 R17.1
IO14: P11.7 R15.2
IO15: P12.3 R18.2
IO18: B5.30 P12.10
IO19: B5.31 P13.1
IO23: B5.37 P13.7
IO25: B5.10 P10.1 PMS5003.RESET R5.2
IO26: B5.11 P11.9 PMS5003.SET R4.1
IO27: B5.12 P11.8
IO32: B5.8 P10.3
IO33: B5.9 P10.2
IO34: B5.6 P10.5
IO35: B5.7 P7.4 P10.4
NC: B5.32 P13.2
NetAMS1_2: AMS1.2 C3.1 R2.1
NetAMS1_3: AMS1.3 C4.2 R1.2
NetAMS2_2: AMS2.2 C10.1 R21.1
NetAMS2_3: AMS2.3 C11.2 R20.1
NetB1_1: B1.1 B2.1 C1.1 F1.2
NetB1_2: B1.2 B2.4 C1.2 P1.1 P2.1
NetB2_2: B2.2 U1.1
NetB2_3: B2.3 U1.2
NetB3_1: B3.1 P9.1 S1.1
NetB3_2: B3.2 R3.2
NetB3_3: B3.3 P9.2 Q1.3
NetB4_5: B4.5 R8.2
NetB4_8: B4.8 R9.2 R10.2
NetB4_9: B4.9 R11.2
NetB4_15: B4.15 R12.1
NetB4_20: B4.20 R6.1
NetB4_21: B4.21 R7.1
NetB5_13: B5.13 R15.1
NetB5_14: B5.14 R16.1
NetB5_16: B5.16 R17.2
NetB5_23: B5.23 R18.1
NetC7_1: C7.1 S2.2
NetC7_2: C7.2 S2.3
NetC8_1: C8.1 S3.2
NetC8_2: C8.2 S3.3
NetF1_1: F1.1 P1.2 P2.2
NetQ1_2: Q1.2 R3.1
NetQ2_1: Q2.1 R13.2
NetQ3_1: Q3.1 R14.2
"OTG ID": J6.4 R22.1
RST: B4.19 Q2.2 R14.1
RX0: B5.34 P6.3 P13.4 R7.2
RXD2: B5.27 P12.7 PMS5003.TX
SCL: B5.36 P4.3 P5.3 P13.6 SSD1306.3
SD0: B5.21 P12.1
SD1: B5.22 P12.2
SD2: B5.17 P11.4
SD3: B5.18 P11.3
SDA: B5.33 P4.4 P5.4 P13.3 SSD1306.4
TX0: B5.35 P6.4 P13.5 R6.2
TXD2: B5.28 P12.8 PMS5003.RX
Vcc5V: D3.1 J6.1 R9.1 R20.2
VDD3V3: B4.6 B4.7 B5.2 C5.2 C6.2 P10.9 R8.1 R11.1 R19.2 R21.2
VN: B5.5 P10.6
VP: B5.4 P10.7
pads on no net: B4.1 B4.10 B4.11 B4.12 B4.13 B4.14 B4.16 B4.17 B4.18 B4.22 B4.24 S1.3

## Silkscreen, mask and mechanical layers (free items; w line width, h text height)
Top Overlay:
  text "5V" at 4960,4795 h47.24
  text "GND" at 4805,4605 h47.24
  text "DO" at 4855,4505 h47.24
  text "3.3V" at 4435,4455 h47.24
  text "AO" at 4855,4410 h47.24
  text "GND" at 4440,4350 h47.24
  text "SCL" at 4440,4250 h47.24
  text "SDA" at 4435,4150 h47.24
  text "3.3V" at 4415,3860 h47.24
  text "5V" at 3320,3835 h47.24 r270
  text "3.3V" at 3430,3835 h47.24 r270
  text "GND" at 3530,3830 h47.24 r270
  text "GND" at 4805,3810 h47.24
  text "GND" at 4410,3755 h47.24
  text "AO" at 4855,3710 h47.24
  text "SCL" at 4410,3660 h47.24
  text "DO" at 4855,3610 h47.24
  text "SDA" at 4405,3555 h47.24
  text "5V" at 4855,3500 h47.24
  text "+" at 5030,3145 h47.24
  text "-" at 5030,3025 h47.24
Bottom Overlay:
  text "GND" at 4140,4920 h47.24
  text "GND" at 3160,4880 h47.24
  text "IO23" at 4140,4820 h47.24
  text "V3.3V" at 3150,4785 h47.24
  text "SCL" at 4145,4720 h47.24
  text "EN" at 3150,4690 h47.24
  text "TX0" at 4140,4615 h47.24
  text "VP" at 3150,4585 h47.24
  text "RX0" at 4140,4515 h47.24
  text "VN" at 3150,4490 h47.24
  text "SDA" at 4140,4420 h47.24
  text "IO34" at 3150,4390 h47.24
  text "DIY Air Quality Monitor 1.0" at 2475,4320 h60 r90
  text "NC" at 4130,4320 h47.24
  text "2022/12/19" at 2575,4300 h60 r90
  text "IO35" at 3155,4290 h47.24
  text "IO19" at 4140,4235 h47.24
  text "GND" at 3360,4230 h47.24 r90
  text "RX0" at 3565,4230 h47.24 r90
  text "TX0" at 3670,4230 h47.24 r90
  text "IO32" at 3150,4190 h47.24
  text "5V" at 3465,4185 h47.24 r90
  text "5V" at 3940,4115 h47.24 r270
  text "SDA" at 3735,4110 h47.24 r270
  text "SCL" at 3840,4110 h47.24 r270
  text "IO33" at 3150,4090 h47.24
  text "GND" at 4035,4090 h47.24 r270
  text "IO25" at 3150,3995 h47.24
  text "IO18" at 4125,3945 h47.24
  text "IO26" at 3150,3860 h47.24
  text "IO5" at 4125,3855 h47.24
  text "TXD2" at 4130,3760 h47.24
  text "IO27" at 3155,3755 h47.24
  text "IO14" at 3155,3660 h47.24
  text "RXD2" at 4130,3660 h47.24
  text "IO4" at 4130,3565 h47.24
  text "IO12" at 3155,3555 h47.24
  text "BOOT" at 4130,3460 h47.24
  text "IO13" at 3155,3455 h47.24
  text "SD2" at 3150,3360 h47.24
  text "IO2" at 4135,3360 h47.24
  text "IO15" at 4125,3265 h47.24
  text "SD3" at 3150,3255 h47.24
  text "SD1" at 4125,3170 h47.24
  text "CMD" at 3150,3155 h47.24
  text "SD0" at 4130,3060 h47.24
  text "CLK" at 3150,3050 h47.24
Mechanical 1:
  lines w10: 1084.01,3038.41 1104.01,2978.41 ; 1084.01,4943.41 1104.01,5003.41 ; 1094.01,2978.41 1114.01,2978.41 ; 1094.01,5003.41 1114.01,5003.41 ; 1104.01,3710 1104.01,2978.41 ; 1104.01,4271.83 1104.01,5003.41 ; 1124.01,3038.41 1104.01,2978.41 ; 1124.01,4943.41 1104.01,5003.41 ; 1219.09,2895 1219.09,2915 ; 1220,4995 1220,2980 5065,2980 5070,2985 5070,4990 5065,4995 1225,4995 ; 1279.09,2885 1219.09,2905 ; 1279.09,2925 1219.09,2905 ; 2863.17,2905 1219.09,2905 ; 3425,2905 5069.09,2905 ; 5009.09,2885 5069.09,2905 ; 5009.09,2925 5069.09,2905 ; 5069.09,2895 5069.09,2915
  text "2025 (mil)" at 1140,3720 h60 r90
  text "3850 (mil)" at 2873.17,2869.01 h60

## Text inside footprints (layer, text, board x,y; h text height)
PMS5003: Top Overlay "5V" at 4377.56,4854.65 h47.24 r90; Top Overlay "GND" at 4475.98,4854.65 h47.24 r90; Top Overlay "SET" at 4574.41,4854.65 h47.24 r90; Top Overlay "RX" at 4672.83,4854.65 h47.24 r90; Top Overlay "RES" at 4869.69,4854.65 h47.24 r90; Top Overlay "TX" at 4771.26,4854.65 h47.24 r90